# Altium PCB PCB1.PcbDoc (part 2 of 7)
Units mm, origin at the board's own origin, x right, y up, seen from the top; angles counter-clockwise.
Board outline 100 x 70 mm, 6 copper layers (Top Layer 1, GND_1, SIG, VCC, GND_2, Bottom Layer 1), stack 0.816 mm thick; 462 components, 328 nets, 2208 pads, 873 vias.
Unrouted connection lines stored in the file: 175.
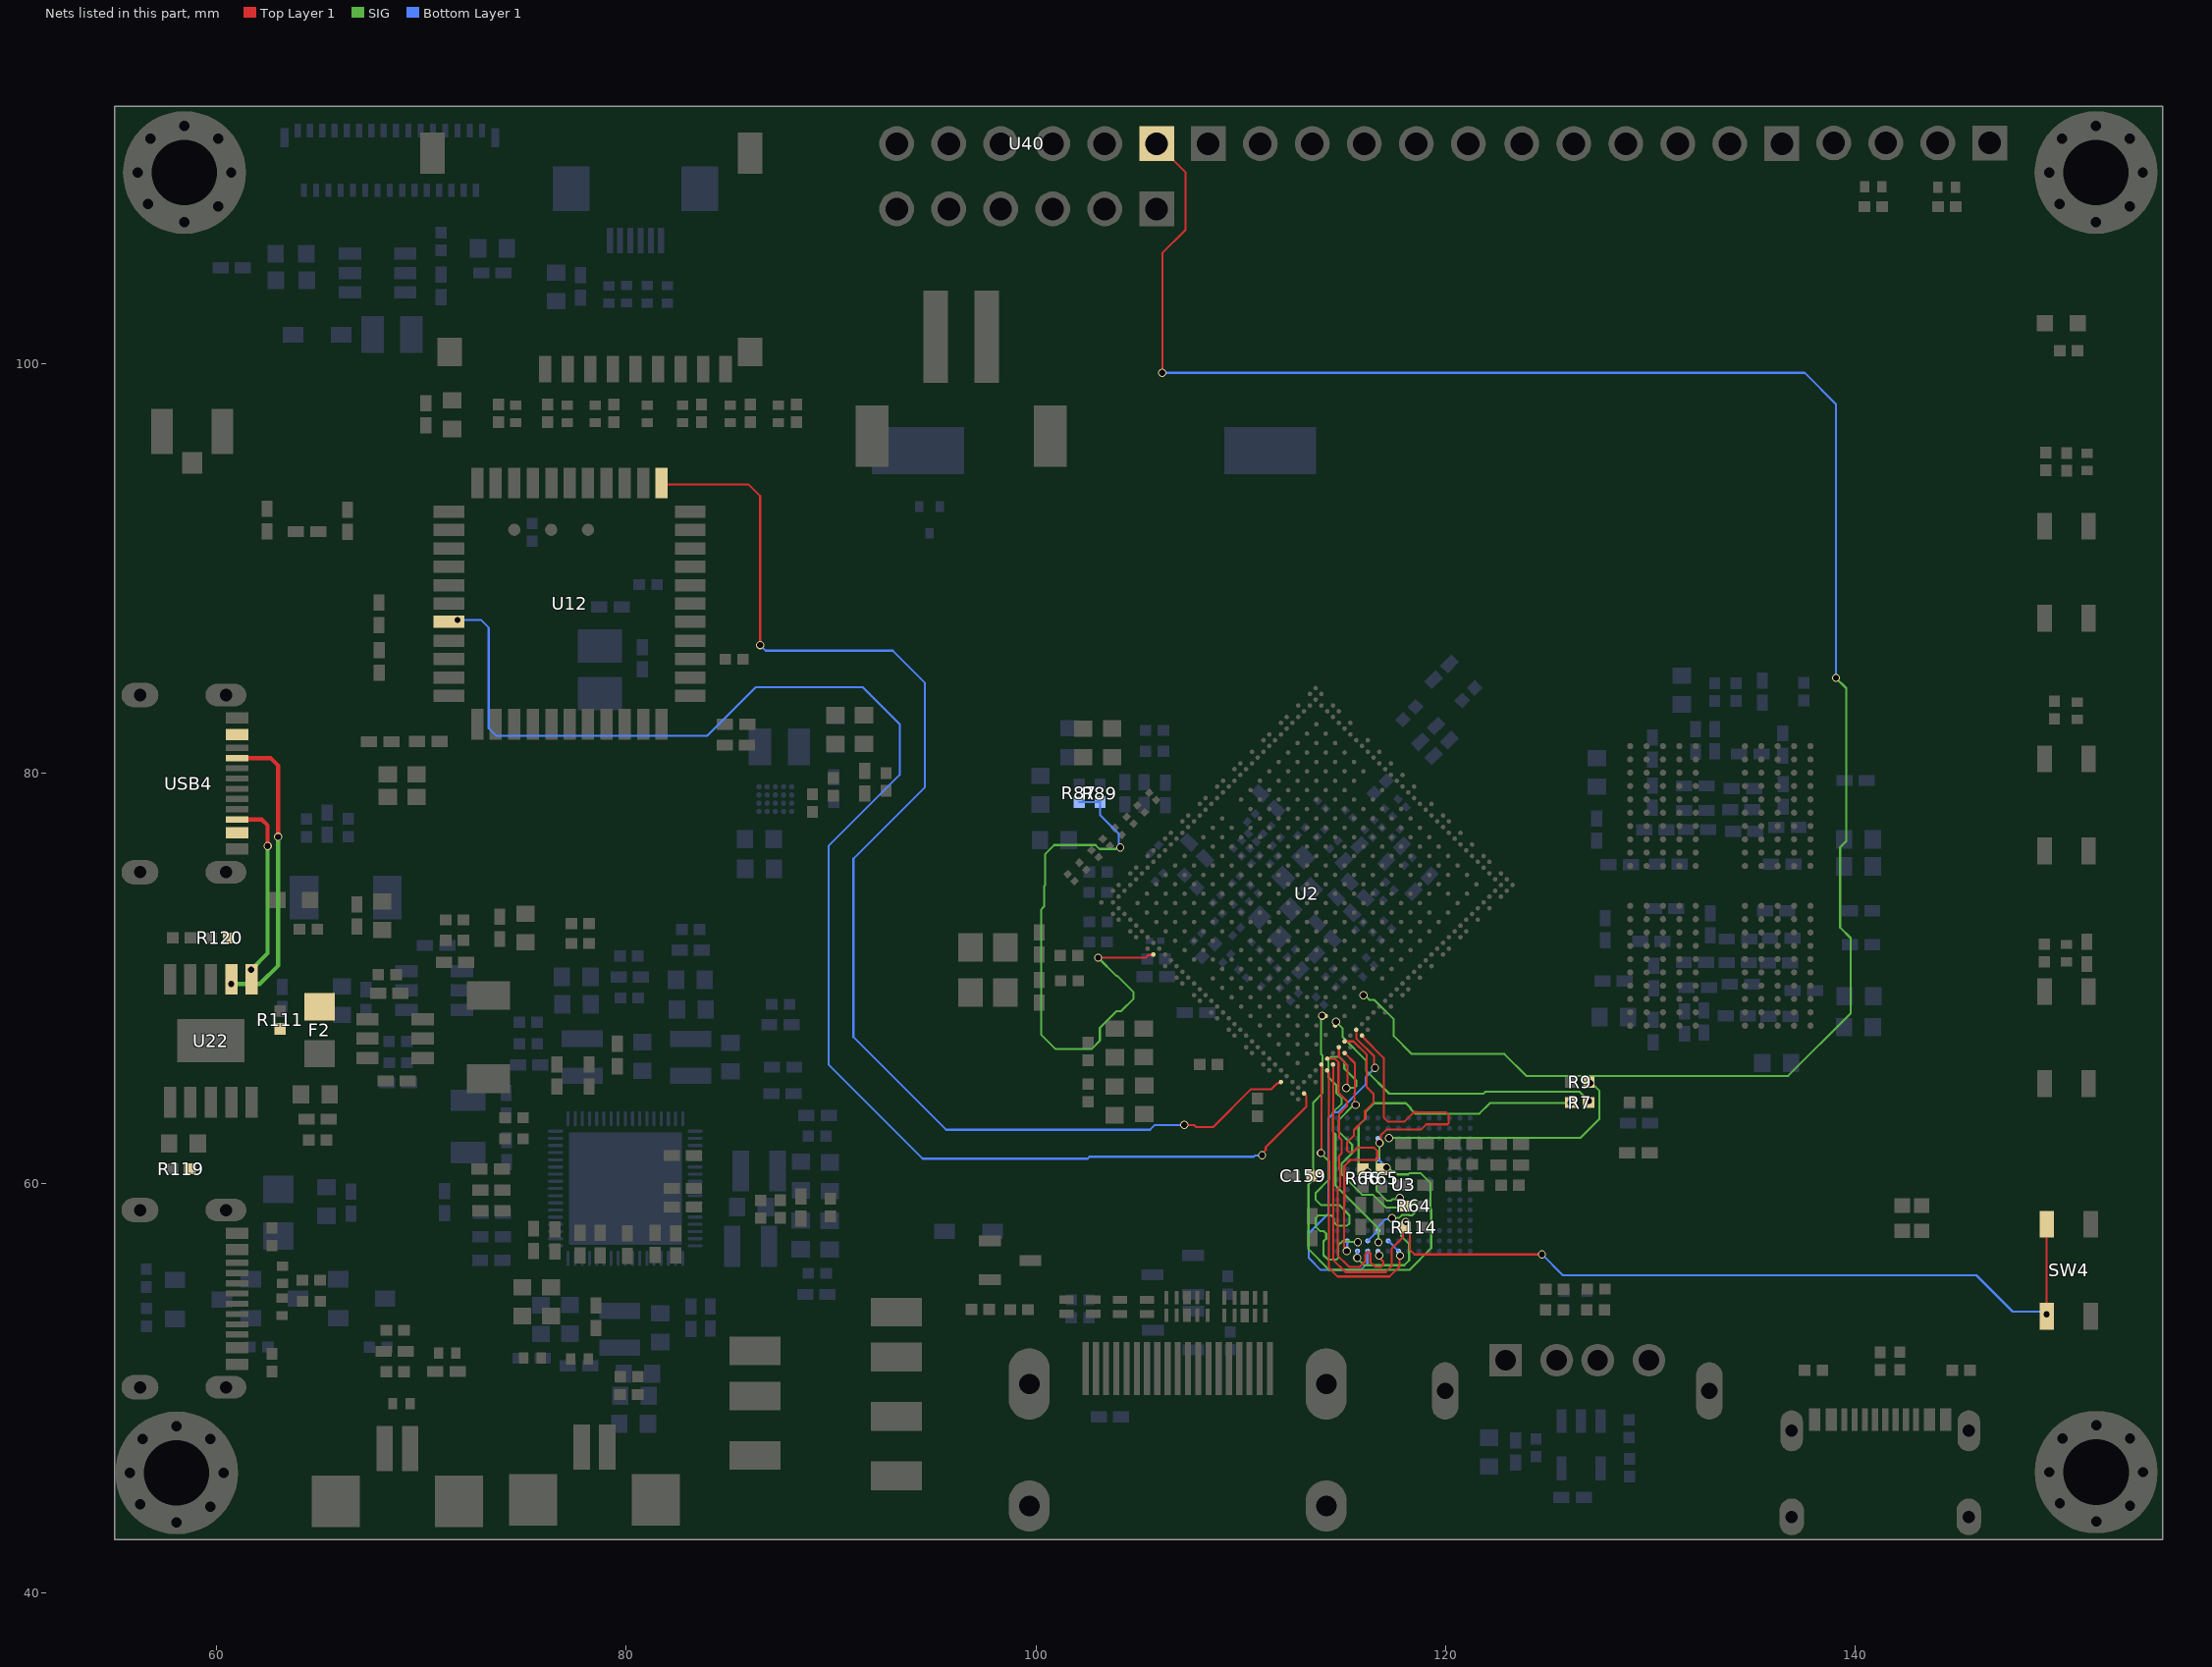
[diagram p6: the nets of this part, all layers, seen from the top]

## Footprints (in the part's own frame and the unit in brackets; to place one, negate y for a bottom-side part, rotate by r counter-clockwise, add the part's x,y. Pads: shape width x height; smd on the part's side, far side on the other; paste and mask are expansions set on the pad) (continued)
ESSOP-10_L4.9-W3.9-P1.0-LS6.0-TL-EP [mm]
  rect 0.6x1.5 smd paste+0 mask+0.05: 1(-2,-3) 2(-1,-3) 3(0,-3) 4(1,-3) 5(2,-3) 6(2,3) 7(1,3) 8(0,3) 9(-1,3) 10(-2,3)
  rect 3.3x2.1 smd paste+0 mask+0.05: 11(0,0)
  silkscreen extent -2.5,-1.95 2.5,1.95, body extent -2.42,-2.88 2.38,2.93, height 1.42
F0805 [mm]
  rect 1.335x1.5 smd paste-100 mask+0.051: 1(-1.142,0) 2(1.142,0)
  silkscreen extent -2.16,-1.02 2.16,1.02, body extent -1.12,-0.66 1.03,0.69, height 0.66
FBGA-153_L13.0-W11.5-P0.50_KLMAG1JETD-B041 [mm]
  round 0.25 smd paste-100 mask+0.05: A1(-3.25,3.25) A2(-2.75,3.25) A3(-2.25,3.25) A4(-1.75,3.25) A5(-1.25,3.25) A6(-0.75,3.25) A7(-0.25,3.25) A8(0.25,3.25) A9(0.75,3.25) A10(1.25,3.25) A11(1.75,3.25) A12(2.25,3.25) A13(2.75,3.25) A14(3.25,3.25) B1(-3.25,2.75) B2(-2.75,2.75) B3(-2.25,2.75) B4(-1.75,2.75) B5(-1.25,2.75) B6(-0.75,2.75) B7(-0.25,2.75) B8(0.25,2.75) B9(0.75,2.75) B10(1.25,2.75) B11(1.75,2.75) B12(2.25,2.75) B13(2.75,2.75) B14(3.25,2.75) C1(-3.25,2.25) C2(-2.75,2.25) C3(-2.25,2.25) C4(-1.75,2.25) C5(-1.25,2.25) C6(-0.75,2.25) C7(-0.25,2.25) C8(0.25,2.25) C9(0.75,2.25) C10(1.25,2.25) C11(1.75,2.25) C12(2.25,2.25) C13(2.75,2.25) C14(3.25,2.25) D1(-3.25,1.75) D2(-2.75,1.75) D3(-2.25,1.75) D4(-1.75,1.75) D12(2.25,1.75) D13(2.75,1.75) D14(3.25,1.75) E1(-3.25,1.25) E2(-2.75,1.25) E3(-2.25,1.25) E5(-1.25,1.25) E6(-0.75,1.25) E7(-0.25,1.25) E8(0.25,1.25) E9(0.75,1.25) E10(1.25,1.25) E12(2.25,1.25) E13(2.75,1.25) E14(3.25,1.25) F1(-3.25,0.75) F2(-2.75,0.75) F3(-2.25,0.75) F5(-1.25,0.75) F10(1.25,0.75) F12(2.25,0.75) F13(2.75,0.75) F14(3.25,0.75) G1(-3.25,0.25) G2(-2.75,0.25) G3(-2.25,0.25) G5(-1.25,0.25) G10(1.25,0.25) G12(2.25,0.25) G13(2.75,0.25) G14(3.25,0.25) H1(-3.25,-0.25) H2(-2.75,-0.25) H3(-2.25,-0.25) H5(-1.25,-0.25) H10(1.25,-0.25) H12(2.25,-0.25) H13(2.75,-0.25) H14(3.25,-0.25) J1(-3.25,-0.75) J2(-2.75,-0.75) J3(-2.25,-0.75) J5(-1.25,-0.75) J10(1.25,-0.75) J12(2.25,-0.75) J13(2.75,-0.75) J14(3.25,-0.75) K1(-3.25,-1.25) K2(-2.75,-1.25) K3(-2.25,-1.25) K5(-1.25,-1.25) K6(-0.75,-1.25) K7(-0.25,-1.25) K8(0.25,-1.25) K9(0.75,-1.25) K10(1.25,-1.25) K12(2.25,-1.25) K13(2.75,-1.25) K14(3.25,-1.25) L1(-3.25,-1.75) L2(-2.75,-1.75) L3(-2.25,-1.75) L12(2.25,-1.75) L13(2.75,-1.75) L14(3.25,-1.75) M1(-3.25,-2.25) M2(-2.75,-2.25) M3(-2.25,-2.25) M4(-1.75,-2.25) M5(-1.25,-2.25) M6(-0.75,-2.25) M7(-0.25,-2.25) M8(0.25,-2.25) M9(0.75,-2.25) M10(1.25,-2.25) M11(1.75,-2.25) M12(2.25,-2.25) M13(2.75,-2.25) M14(3.25,-2.25) N1(-3.25,-2.75) N2(-2.75,-2.75) N3(-2.25,-2.75) N4(-1.75,-2.75) N5(-1.25,-2.75) N6(-0.75,-2.75) N7(-0.25,-2.75) N8(0.25,-2.75) N9(0.75,-2.75) N10(1.25,-2.75) N11(1.75,-2.75) N12(2.25,-2.75) N13(2.75,-2.75) N14(3.25,-2.75) P1(-3.25,-3.25) P2(-2.75,-3.25) P3(-2.25,-3.25) P4(-1.75,-3.25) P5(-1.25,-3.25) P6(-0.75,-3.25) P7(-0.25,-3.25) P8(0.25,-3.25) P9(0.75,-3.25) P10(1.25,-3.25) P11(1.75,-3.25) P12(2.25,-3.25) P13(2.75,-3.25) P14(3.25,-3.25)
  silkscreen extent -6.22,-6.61 5.84,6.86, body extent -5.84,-6.6 5.84,6.48, height 0.25
FBGA-200_L15.0-W10.0-BL_H9HCNNNBKUMLXR [mm]
  round 0.3 smd paste+0 mask+0.05: A1(-6.825,-4.4) A2(-6.825,-3.6) A3(-6.825,-2.8) A4(-6.825,-2) A5(-6.825,-1.2) A8(-6.825,1.2) A9(-6.825,2) A10(-6.825,2.8) A11(-6.825,3.6) A12(-6.825,4.4) AA1(6.175,-4.4) AA2(6.175,-3.6) AA3(6.175,-2.8) AA4(6.175,-2) AA5(6.175,-1.2) AA8(6.175,1.2) AA9(6.175,2) AA10(6.175,2.8) AA11(6.175,3.6) AA12(6.175,4.4) AB1(6.825,-4.4) AB2(6.825,-3.6) AB3(6.825,-2.8) AB4(6.825,-2) AB5(6.825,-1.2) AB8(6.825,1.2) AB9(6.825,2) AB10(6.825,2.8) AB11(6.825,3.6) AB12(6.825,4.4) B1(-6.175,-4.4) B2(-6.175,-3.6) B3(-6.175,-2.8) B4(-6.175,-2) B5(-6.175,-1.2) B8(-6.175,1.2) B9(-6.175,2) B10(-6.175,2.8) B11(-6.175,3.6) B12(-6.175,4.4) C1(-5.525,-4.4) C2(-5.525,-3.6) C3(-5.525,-2.8) C4(-5.525,-2) C5(-5.525,-1.2) C8(-5.525,1.2) C9(-5.525,2) C10(-5.525,2.8) C11(-5.525,3.6) C12(-5.525,4.4) D1(-4.875,-4.4) D2(-4.875,-3.6) D3(-4.875,-2.8) D4(-4.875,-2) D5(-4.875,-1.2) D8(-4.875,1.2) D9(-4.875,2) D10(-4.875,2.8) D11(-4.875,3.6) D12(-4.875,4.4) E1(-4.225,-4.4) E2(-4.225,-3.6) E3(-4.225,-2.8) E4(-4.225,-2) E5(-4.225,-1.2) E8(-4.225,1.2) E9(-4.225,2) E10(-4.225,2.8) E11(-4.225,3.6) E12(-4.225,4.4) F1(-3.575,-4.4) F2(-3.575,-3.6) F3(-3.575,-2.8) F4(-3.575,-2) F5(-3.575,-1.2) F8(-3.575,1.2) F9(-3.575,2) F10(-3.575,2.8) F11(-3.575,3.6) F12(-3.575,4.4) G1(-2.925,-4.4) G2(-2.925,-3.6) G3(-2.925,-2.8) G4(-2.925,-2) G5(-2.925,-1.2) G8(-2.925,1.2) G9(-2.925,2) G10(-2.925,2.8) G11(-2.925,3.6) G12(-2.925,4.4) H1(-2.275,-4.4) H2(-2.275,-3.6) H3(-2.275,-2.8) H4(-2.275,-2) H5(-2.275,-1.2) H8(-2.275,1.2) H9(-2.275,2) H10(-2.275,2.8) H11(-2.275,3.6) H12(-2.275,4.4) J1(-1.625,-4.4) J2(-1.625,-3.6) J3(-1.625,-2.8) J4(-1.625,-2) J5(-1.625,-1.2) J8(-1.625,1.2) J9(-1.625,2) J10(-1.625,2.8) J11(-1.625,3.6) J12(-1.625,4.4) K1(-0.975,-4.4) K2(-0.975,-3.6) K3(-0.975,-2.8) K4(-0.975,-2) K5(-0.975,-1.2) K8(-0.975,1.2) K9(-0.975,2) K10(-0.975,2.8) K11(-0.975,3.6) K12(-0.975,4.4) N1(0.975,-4.4) N2(0.975,-3.6) N3(0.975,-2.8) N4(0.975,-2) N5(0.975,-1.2) N8(0.975,1.2) N9(0.975,2) N10(0.975,2.8) N11(0.975,3.6) N12(0.975,4.4) P1(1.625,-4.4) P2(1.625,-3.6) P3(1.625,-2.8) P4(1.625,-2) P5(1.625,-1.2) P8(1.625,1.2) P9(1.625,2) P10(1.625,2.8) P11(1.625,3.6) P12(1.625,4.4) R1(2.275,-4.4) R2(2.275,-3.6) R3(2.275,-2.8) R4(2.275,-2) R5(2.275,-1.2) R8(2.275,1.2) R9(2.275,2) R10(2.275,2.8) R11(2.275,3.6) R12(2.275,4.4) T1(2.925,-4.4) T2(2.925,-3.6) T3(2.925,-2.8) T4(2.925,-2) T5(2.925,-1.2) T8(2.925,1.2) T9(2.925,2) T10(2.925,2.8) T11(2.925,3.6) T12(2.925,4.4) U1(3.575,-4.4) U2(3.575,-3.6) U3(3.575,-2.8) U4(3.575,-2) U5(3.575,-1.2) U8(3.575,1.2) U9(3.575,2) U10(3.575,2.8) U11(3.575,3.6) U12(3.575,4.4) V1(4.225,-4.4) V2(4.225,-3.6) V3(4.225,-2.8) V4(4.225,-2) V5(4.225,-1.2) V8(4.225,1.2) V9(4.225,2) V10(4.225,2.8) V11(4.225,3.6) V12(4.225,4.4) W1(4.875,-4.4) W2(4.875,-3.6) W3(4.875,-2.8) W4(4.875,-2) W5(4.875,-1.2) W8(4.875,1.2) W9(4.875,2) W10(4.875,2.8) W11(4.875,3.6) W12(4.875,4.4) Y1(5.525,-4.4) Y2(5.525,-3.6) Y3(5.525,-2.8) Y4(5.525,-2) Y5(5.525,-1.2) Y8(5.525,1.2) Y9(5.525,2) Y10(5.525,2.8) Y11(5.525,3.6) Y12(5.525,4.4)
  silkscreen extent -7.8,-5.52 7.58,5.08, body extent -7.49,-5.08 7.62,5.08, height 0.25
FPC-SMD_6P-P0.50_DEALON_0.5K-DX-6PWB [mm]
  rect 0.3x1.25 smd paste+0 mask+0.05: 1(-1.25,2.406) 2(-0.75,2.406) 3(-0.25,2.406) 4(0.25,2.406) 5(0.75,2.406) 6(1.25,2.406)
  rect 1.8x2.2 smd paste+0 mask+0.05: 7(3.15,-0.12) 8(-3.15,-0.12)
  silkscreen extent -4.2,-3.09 4.2,2.71, body extent -3.25,-3.11 3.25,2.29, height 2.03
FPC-SMD_P0.30-31P_FGS-XJ-H1.0 [mm]
  rect 0.3x0.65 smd paste+0.051: 1(-4.5,-1.453) 2(-4.2,1.453) 3(-3.9,-1.453) 4(-3.6,1.453) 5(-3.3,-1.453) 6(-3,1.453) 7(-2.7,-1.453) 8(-2.4,1.453) 9(-2.1,-1.453) 10(-1.8,1.453) 11(-1.5,-1.453) 12(-1.2,1.453) 13(-0.9,-1.453) 14(-0.6,1.453) 15(-0.3,-1.453) 16(0,1.453) 17(0.3,-1.453) 18(0.6,1.453) 19(0.9,-1.453) 20(1.2,1.453) 21(1.5,-1.453) 22(1.8,1.453) 23(2.1,-1.453) 24(2.4,1.453) 25(2.7,-1.453) 26(3,1.453) 27(3.3,-1.453) 28(3.6,1.453) 29(3.9,-1.453) 30(4.2,1.453) 31(4.5,-1.453)
  rect 0.4x0.95 smd paste+0.051: 32(-5.15,-1.103) 33(5.15,-1.103)
  silkscreen extent -5.5,-1.95 5.5,1.6, body extent -5.46,-1.78 5.34,1.7, height 1.01
HDMI-SMD_KH-HDMI-19P-CU [mm]
  rect 0.3x2.6 smd paste-100 mask+0.051: 1(4.5,3.36) 2(4,3.36) 3(3.5,3.36) 4(3,3.36) 5(2.5,3.36) 6(2,3.36) 7(1.5,3.36) 8(1,3.36) 9(0.5,3.36) 10(0,3.36) 11(-0.5,3.36) 12(-1,3.36) 13(-1.5,3.36) 14(-2,3.36) 15(-2.5,3.36) 16(-3,3.36) 17(-3.5,3.36) 18(-4,3.36) 19(-4.5,3.36)
  oval 2x3.5 hole 1 slot 2.8 at 90 deg: 20(-7.25,2.6) 21(7.25,2.6)
  oval 2x2.5 hole 1 slot 1.8 at 90 deg: 22(-7.25,-3.36) 23(7.25,-3.36)
  silkscreen extent -7.62,-8.13 7.62,4.57, body extent -7.45,-7.89 7.55,4.31, height 6.29
HDR-TH_4P-P2.54-V-M [mm]
  rect 1.7x1.7 hole 1.1 paste-2539.97: 1(-3.81,0)
  round 1.7 hole 1.1 paste-2539.97: 2(-1.27,0) 3(1.27,0) 4(3.81,0)
  silkscreen extent -5.08,-1.27 5.08,1.27, body extent -5.04,-1.34 5.12,1.2, height 10.13
HDR-TH_6P-P2.54-V-M [mm]
  rect 1.7x1.7 hole 1.1: 1(-6.35,0)
  round 1.7 hole 1.1: 2(-3.81,0) 3(-1.27,0) 4(1.27,0) 5(3.81,0) 6(6.35,0)
  silkscreen extent -7.6,-1.3 7.65,1.3, body extent -7.71,-1.38 7.53,1.16, height 9.63
IND-SMD_L2.0-W1.6_MHCHL201610A-1R0M-Q8A [mm]
  rect 0.8x2 smd paste+0.051: 1(-0.9,0) 2(0.9,0)
  silkscreen extent -0.46,-1.14 0.46,1.14, body extent -1,-0.65 1,0.6, height 1.1
IND-SMD_L2.5-W2.0_WPN252012H [mm]
  rect 1.1x1.8 smd: 1(-0.95,0) 2(0.95,0)
  silkscreen extent -1.33,-1.09 1.33,1.09, body extent -1.25,-0.98 1.25,0.92, height 1.1
IND-SMD_L4.4-W4.2 [mm]
  rect 1.4x2.12 smd paste+0.051: 1(2.028,0) 2(-2.028,0)
  silkscreen extent -2.28,-2.18 2.28,2.18, body extent -2.17,-2.05 2.17,2.05, height 1.05
L0603 [mm]
  rect 0.8x0.864 smd paste-100 mask+0.051: 1(-0.7,0) 2(0.7,0)
  silkscreen extent -1.42,-0.65 1.42,0.65, body extent -0.8,-0.4 0.8,0.4, height 0.81
L1008 [mm]
  rect 1.635x2.16 smd paste-100 mask+0.051: 1(-1.168,0) 2(1.168,0)
  silkscreen extent -2.27,-1.27 2.27,1.3, body extent -1.22,-1.02 1.28,0.98, height 1
LED0603-BL [mm]
  rect 0.8x0.8 smd: 1(-0.926,0) 2(0.672,0)
  silkscreen extent -1.62,-0.75 1.26,0.76, body extent -0.93,-0.4 0.67,0.4, height 0.53
LED-ARRAY-SMD_4P-L1.6-W1.6_SY-PB2333RGBC-010F [mm]
  rect 0.7x0.75 smd paste+0.051: 1(-0.62,0.475) 2(0.62,0.475) 3(-0.62,-0.475) 4(0.62,-0.475)
  silkscreen extent -1.27,-1.14 1.4,1.14, body extent -1.1,-1 1.1,1, height 0.84
QFN-44_L12.0-W12.0-P0.90-TL_AP6212 [mm]
  rect 1.5x0.6 smd paste+0 mask+0.05: 1(-5.889,4.496) 2(-5.889,3.607) 3(-5.889,2.692) 4(-5.889,1.803) 5(-5.889,0.889) 6(-5.889,0) 7(-5.889,-0.889) 8(-5.889,-1.803) 9(-5.889,-2.692) 10(-5.889,-3.607) 11(-5.889,-4.496) 23(5.889,-4.496) 24(5.889,-3.607) 25(5.889,-2.692) 26(5.889,-1.803) 27(5.889,-0.889) 28(5.889,0) 29(5.889,0.889) 30(5.889,1.803) 31(5.889,2.692) 32(5.889,3.607) 33(5.889,4.496)
  rect 0.6x1.5 smd paste+0 mask+0.05: 12(-4.496,-5.889) 13(-3.607,-5.889) 14(-2.692,-5.889) 15(-1.803,-5.889) 16(-0.889,-5.889) 17(0,-5.889) 18(0.889,-5.889) 19(1.803,-5.889) 20(2.692,-5.889) 21(3.607,-5.889) 22(4.496,-5.889) 34(4.496,5.889) 35(3.607,5.889) 36(2.692,5.889) 37(1.803,5.889) 38(0.889,5.889) 39(0,5.889) 40(-0.889,5.889) 41(-1.803,5.889) 42(-2.692,5.889) 43(-3.607,5.889) 44(-4.496,5.889)
  round 0.6 smd paste+0 mask+0.05: 45(-2.7,3.607) 46(-0.9,3.607) 47(0.9,3.607)
  silkscreen extent -5.99,-5.99 5.99,5.99, body extent -5.97,-5.97 5.97,6.02, height 0.51
QFN-68_L7.0-W7.0-P0.35-BL-EP5.5 [mm]
  oval 0.74x0.15 smd paste-100 mask+0.051: 1(-3.407,2.8) 2(-3.407,2.45) 3(-3.407,2.1) 4(-3.407,1.75) 5(-3.407,1.4) 6(-3.407,1.05) 7(-3.407,0.7) 8(-3.407,0.35) 9(-3.407,0) 10(-3.407,-0.35) 11(-3.407,-0.7) 12(-3.407,-1.05) 13(-3.407,-1.4) 14(-3.407,-1.75) 15(-3.407,-2.1) 16(-3.407,-2.45) 17(-3.407,-2.8) 35(3.407,-2.8) 36(3.407,-2.45) 37(3.407,-2.1) 38(3.407,-1.75) 39(3.407,-1.4) 40(3.407,-1.05) 41(3.407,-0.7) 42(3.407,-0.35) 43(3.407,0) 44(3.407,0.35) 45(3.407,0.7) 46(3.407,1.05) 47(3.407,1.4) 48(3.407,1.75) 49(3.407,2.1) 50(3.407,2.45) 51(3.407,2.8)
  oval 0.15x0.74 smd paste-100 mask+0.051: 18(-2.8,-3.407) 19(-2.45,-3.407) 20(-2.1,-3.407) 21(-1.75,-3.407) 22(-1.4,-3.407) 23(-1.05,-3.407) 24(-0.7,-3.407) 25(-0.35,-3.407) 26(0,-3.407) 27(0.35,-3.407) 28(0.7,-3.407) 29(1.05,-3.407) 30(1.4,-3.407) 31(1.75,-3.407) 32(2.1,-3.407) 33(2.45,-3.407) 34(2.8,-3.407) 52(2.8,3.407) 53(2.45,3.407) 54(2.1,3.407) 55(1.75,3.407) 56(1.4,3.407) 57(1.05,3.407) 58(0.7,3.407) 59(0.35,3.407) 60(0,3.407) 61(-0.35,3.407) 62(-0.7,3.407) 63(-1.05,3.407) 64(-1.4,3.407) 65(-1.75,3.407) 66(-2.1,3.407) 67(-2.45,3.407) 68(-2.8,3.407)
  rect 5.5x5.5 smd paste-100 mask+0.051: 69(0,0)
  silkscreen extent -4.19,-3.58 3.58,3.58, body extent -3.56,-3.56 3.56,3.56, height 0.25
R0201 [mm]
  rect 0.303x0.324 smd paste-100 mask+0.051: 1(-0.242,0) 2(0.242,0)
  silkscreen extent -0.62,-0.39 0.62,0.39, body extent -0.3,-0.15 0.3,0.15, height 0.23
R0402 [mm]
  rect 0.566x0.54 smd paste-100 mask+0.051: 1(-0.433,0) 2(0.433,0)
  silkscreen extent -0.94,-0.5 0.94,0.5, body extent -0.49,-0.26 0.51,0.24, height 0.35
R0603 [mm]
  rect 0.806x0.864 smd paste-100 mask+0.051: 1(-0.753,0) 2(0.753,0)
  silkscreen extent -1.39,-0.66 1.39,0.66, body extent -0.82,-0.4 0.78,0.4, height 0.45
RF-SMD_FRF05002-JSS103M [mm]
  rect 1x1.05 smd paste+0 mask+0.05: 1(0,-0.762)
  rect 1.05x2.2 smd paste+0 mask+0.05: 2(-1.475,0.762) 3(1.475,0.762)
  silkscreen extent -1.3,-0.63 1.3,2.35, body extent -1.49,-0.87 1.51,2.23, height 1.25
SOD-323_L1.8-W1.3-LS2.5-RD [mm]
  rect 1x0.75 smd: 1(-1.173,0) 2(1.173,0)
  silkscreen extent -1.08,-0.8 0.9,0.8, body extent -1.24,-0.7 1.26,0.7, height 0.62
SOT-23-3_L2.9-W1.3-P1.90-LS2.3-BR [mm]
  rect 1.07x0.532 smd: 1(0.99,-0.95) 2(0.99,0.95) 3(-0.99,0)
  silkscreen extent -0.66,-1.45 0.64,1.45, body extent -1.2,-1.45 1.2,1.45, height 1.15
SOT-23-5_L3.0-W1.7-P0.95-LS2.8-BL [mm]
  rect 0.49x1.157 smd: 1(-0.95,-1.154) 2(0,-1.154) 3(0.95,-1.154)
  rect 0.49x1.175 smd: 4(0.95,1.154) 5(-0.95,1.154)
  silkscreen extent -1.8,-1.29 1.53,0.85, body extent -1.5,-1.42 1.5,1.42, height 1.22
SOT-23-6_L2.9-W1.6-P0.95-LS2.8-BR [mm]
  rect 1.1x0.6 smd paste+0 mask+0.051: 1(1.35,-0.95) 2(1.35,0) 3(1.35,0.95) 4(-1.35,0.95) 5(-1.35,0) 6(-1.35,-0.95)
  silkscreen extent -0.9,-1.78 1.52,1.55, body extent -1.62,-1.46 1.58,1.46, height 1.15
SOT-23_L2.9-W1.3-P1.90-LS2.4-BR [mm]
  rect 1x0.8 smd: 1(1.15,-0.95) 2(1.15,0.95) 3(-1.15,0)
  silkscreen extent -0.7,-1.5 0.7,1.5, body extent -1.18,-1.46 1.18,1.46, height 1.12
SOT-523-3_L1.6-W0.8-P1.00-LS1.6-BR [mm]
  rect 0.51x0.4 smd paste+0.051: 1(0.65,-0.5) 2(0.65,0.5) 3(-0.65,0)
  silkscreen extent -0.45,-1.08 0.83,0.9, body extent -1.02,-1.02 1.08,0.98, height 1.1
SW-SMD_4P-L4.2-W3.3-P2.15-LS5.1 [mm]
  rect 1.3x0.7 smd paste+0.051: 1(-2.25,1.075) 2(2.25,1.075) 3(-2.25,-1.075) 4(2.25,-1.075)
  silkscreen extent -2.1,-1.7 2.1,1.7, body extent -2.55,-1.65 2.55,1.65, height 2.4
TCS4525 [mm]
  round 0.265 smd paste+0.051: A1(0,0) A2(0.4,0) A3(0.8,0) A4(1.2,0) B1(0,-0.4) B2(0.4,-0.4) B3(0.8,-0.4) B4(1.2,-0.4) C1(0,-0.8) C2(0.4,-0.8) C3(0.8,-0.8) C4(1.2,-0.8) D1(0,-1.2) D2(0.4,-1.2) D3(0.8,-1.2) D4(1.2,-1.2) E1(0,-1.6) E2(0.4,-1.6) E3(0.8,-1.6) E4(1.2,-1.6)
  silkscreen extent -0.38,-1.82 1.44,0.39, body extent -0.22,-1.79 1.43,0.24, height 0.25
TF-SMD_TF-01A [mm]
  rect 0.6x1.3 smd: 1(2.24,5.276) 2(1.14,5.276) 3(0.04,5.276) 4(-1.06,5.276) 5(-2.16,5.276) 6(-3.26,5.276) 7(-4.36,5.276) 8(-5.46,5.276) 9(-6.56,5.276)
  rect 1.2x1.4 smd: 10(-7.76,4.426) 13(6.92,4.426)
  rect 1.2x2 smd: 11(-7.76,-5.276) 12(7.76,-5.276)
  Keep-Out Layer board cut-out: 3.55,-5.566 3.55,-5.666 3.474,-5.849 3.333,-5.99 3.149,-6.066 2.951,-6.066 2.767,-5.99 2.626,-5.849 2.55,-5.666 2.55,-5.566 2.55,-5.467 2.626,-5.283 2.767,-5.142 2.951,-5.066 3.149,-5.066 3.333,-5.142 3.474,-5.283 3.55,-5.467 3.55,-5.566 3.55,-5.566
  Keep-Out Layer board cut-out: -4.45,-5.566 -4.45,-5.666 -4.526,-5.849 -4.667,-5.99 -4.85,-6.066 -5.049,-6.066 -5.233,-5.99 -5.374,-5.849 -5.45,-5.666 -5.45,-5.566 -5.45,-5.467 -5.374,-5.283 -5.233,-5.142 -5.049,-5.066 -4.85,-5.066 -4.667,-5.142 -4.526,-5.283 -4.45,-5.467 -4.45,-5.566 -4.45,-5.566
  Keep-Out Layer circle w0.025: c3.05,-5.566 r0.5
  Keep-Out Layer circle w0.025: c-4.95,-5.566 r0.5
  Keep-Out Layer region: 3.55,-5.566 3.55,-5.666 3.474,-5.849 3.333,-5.99 3.149,-6.066 2.951,-6.066 2.767,-5.99 2.626,-5.849 2.55,-5.666 2.55,-5.566 2.55,-5.467 2.626,-5.283 2.767,-5.142 2.951,-5.066 3.149,-5.066 3.333,-5.142 3.474,-5.283 3.55,-5.467 3.55,-5.566 3.55,-5.566
  Keep-Out Layer region: -4.45,-5.566 -4.45,-5.666 -4.526,-5.849 -4.667,-5.99 -4.85,-6.066 -5.049,-6.066 -5.233,-5.99 -5.374,-5.849 -5.45,-5.666 -5.45,-5.566 -5.45,-5.467 -5.374,-5.283 -5.233,-5.142 -5.049,-5.066 -4.85,-5.066 -4.667,-5.142 -4.526,-5.283 -4.45,-5.467 -4.45,-5.566 -4.45,-5.566
  silkscreen extent -7.37,-9.58 7.37,3.41, body extent -8,-9.78 7.97,5.71, height 1.92
USB-A-TH_AF-10.0-HC6.3 [mm]
  rect 1.6x1.6 hole 1 paste-2539.97 mask+0.05: 1(-3.5,0.75)
  round 1.6 hole 1 paste-2539.97 mask+0.05: 2(-1,0.75) 3(1,0.75) 4(3.5,0.75)
  oval 1.3x2.8 hole 0.8 slot 2.1 at 90 deg paste-2539.97 mask+0.05: 5(-6.45,-0.75) 6(6.45,-0.75)
  silkscreen extent -6.6,-9.27 6.6,1.02, body extent -7.34,-13.48 7.16,1.18, height 7.48
USB-C-SMD_TYPE-C-6PIN-2MD-073 [mm]
  rect 0.55x1.1 smd paste-100 mask+0.05: 1(-3.2,3.391) 2(-2.4,3.391) 11(2.4,3.391) 12(3.2,3.391)
  rect 0.3x1.1 smd paste-100 mask+0.05: 3(-1.75,3.391) 4(-1.25,3.391) 5(-0.75,3.391) 6(-0.25,3.391) 7(0.25,3.391) 8(0.75,3.391) 9(1.25,3.391) 10(1.75,3.391)
  oval 1.2x1.8 hole 0.6 slot 1.2 at 90 deg paste-2539.97 mask+0.05: 13(-4.325,-1.359) 14(4.325,-1.359)
  oval 1.1x2 hole 0.6 slot 1.5 at 90 deg paste-2539.97 mask+0.05: 13(-4.325,2.841) 14(4.325,2.841)
  Keep-Out Layer board cut-out: 3.24,2.321 3.24,2.251 3.187,2.123 3.088,2.024 2.96,1.971 2.821,1.971 2.692,2.024 2.593,2.123 2.54,2.251 2.54,2.321 2.54,2.391 2.593,2.519 2.692,2.618 2.821,2.671 2.96,2.671 3.088,2.618 3.187,2.519 3.24,2.391 3.24,2.321 3.24,2.321
  Keep-Out Layer board cut-out: -2.54,2.321 -2.54,2.251 -2.593,2.123 -2.692,2.024 -2.82,1.971 -2.96,1.971 -3.088,2.024 -3.187,2.123 -3.24,2.251 -3.24,2.321 -3.24,2.391 -3.187,2.519 -3.088,2.618 -2.96,2.671 -2.82,2.671 -2.692,2.618 -2.593,2.519 -2.54,2.391 -2.54,2.321 -2.54,2.321
  Keep-Out Layer circle w0.025: c2.89,2.321 r0.35
  Keep-Out Layer circle w0.025: c-2.89,2.321 r0.35
  Keep-Out Layer region: 3.24,2.321 3.24,2.251 3.187,2.123 3.088,2.024 2.96,1.971 2.821,1.971 2.692,2.024 2.593,2.123 2.54,2.251 2.54,2.321 2.54,2.391 2.593,2.519 2.692,2.618 2.821,2.671 2.96,2.671 3.088,2.618 3.187,2.519 3.24,2.391 3.24,2.321 3.24,2.321
  Keep-Out Layer region: -2.54,2.321 -2.54,2.251 -2.593,2.123 -2.692,2.024 -2.82,1.971 -2.96,1.971 -3.088,2.024 -3.187,2.123 -3.24,2.251 -3.24,2.321 -3.24,2.391 -3.187,2.519 -3.088,2.618 -2.96,2.671 -2.82,2.671 -2.692,2.618 -2.593,2.519 -2.54,2.391 -2.54,2.321 -2.54,2.321
  silkscreen extent -4.5,-3.96 4.57,1.61, body extent -4.48,-3.85 4.46,3.75, height 3.1
X1-DFN1006-2_L1.0-W0.6-RD [mm]
  rect 0.4x0.7 smd paste+0.051: 1(-0.35,0) 2(0.35,0)
  silkscreen extent -0.85,-0.51 0.71,0.51, body extent -0.7,-0.51 0.7,0.54, height 0.4

## Part data
*1: "LDO from TaoBao"
AUDIO1: "3.5mm耳机座 七脚四极带三组开关耳机插座；耐高温贴片耳机插座", Symbol=PJ-393_C2837065
BT1: "Battery", Symbol=CR1220-2ZX
C1 C21 C65 C76 C78 C84 C87 C92 C105 C118 C119 C120 C121 C122 C127 C129 C132 C133 C134 C139 C141 C146 C148: "16V 22uF X5R ±20% 0603 Ceramic Capacitors ROHS"
C2 C3 C22 C23 C57 C59 C67 C77 C79 C80 C85 C88 C93 C101 C106 C112 C128 C140 C147 C150 C154 C168 C172 C189 C190 C242 C244 C251: "10V 10uF X5R ±10% 0603 Ceramic Capacitors ROHS"
C4 C24 C47 C49 C55 C71 C72 C74 C75 C82 C83 C86 C90 C94 C95 C96 C97 C98 C99 C102 C103 C104 C107 C108 C110 C111 C123 C125 C170 C206 C218 C219 C222 C224 C228 C252: "50V 1uF X5R ±10% 0402 Ceramic Capacitors ROHS"
C5 C6 C7 C8 C9 C10 C11 C12 C13 C14 C15 C16 C17 C18 C19 C20 C25 C26 C27 C28 C29 C30 C31 C32 C33 C34 C35 C36 C37 C38 C39 C40 C41 C42 C46 C50 C53 C58 C60 C63 C66 C68 C69 C70 C91 C100 C116 C151 C152 C153 C155 C156 C157 C159 C160 C161 C162 C163 C165 C166 C169 C171 C173 C179 C191 C200 C233 C240 C243 C245 C246 C250: "50V 100nF X7R ±10% 0402 Ceramic Capacitors ROHS"
C43 C44 C124: library part 1nF, "50V 1nF X7R ±10% 0402 Ceramic Capacitors ROHS"
C45: "50V 10pF C0G ±5% 0402 Ceramic Capacitors ROHS"
C48 C51 C61 C62 C248 C249: "50V 12pF C0G ±5% 0402 Ceramic Capacitors ROHS"
C52 C56 C109 C135 C136 C138 C143 C144 C145 C164 C167 C174 C183 C184 C188 C201: "10V 4.7uF X5R ±20% 0402 Ceramic Capacitors ROHS"
C54 C126 C130 C131 C137 C142 C180 C181 C182 C185 C186 C187 C192 C193 C194 C195 C196 C197 C198 C199 C202 C203 C204 C205 C207 C208 C209 C210 C211 C212 C213 C214 C215 C216 C217 C220 C221 C223 C225 C226 C227 C229 C230 C231 C234 C237 C238 C239: "CL03A104KO3NNNC"
C64 C241: "50V 22pF C0G ±5% 0402 Ceramic Capacitors ROHS"
C73 C81 C89 C235 C236: "50V 1nF X7R ±10% 0402 Ceramic Capacitors ROHS"
C113: "50V 100pF C0G ±5% 0402 Ceramic Capacitors ROHS"
C114 C115: "50V 680pF C0G ±5% 0402 Ceramic Capacitors ROHS"
C117: "50V 27pF C0G ±5% 0402 Ceramic Capacitors ROHS"
C149: library part 10nF, "50V 10nF X7R ±10% 0402 Ceramic Capacitors ROHS"
C158 C247: "50V 2.2uF NP0 0402 Ceramic Capacitors ROHS"
C253: "16V 220pF X7R ±10% 0402 Ceramic Capacitors ROHS"
CN1: "HDMI-A SMD USB, DVI, HDMI Connector Assemblies ROHS", Current Rating (Max)=-, JLCPCB Part Class="Extended Part", Manufacturer=kinghelm(金航标), Add into BOM=yes, Connector Type=HDMI-A, Convert to PCB=yes, Datasheet=https://atta.szlcsc.com/upload/public/pdf/source/20211208/D47DE7411E98B8CA58BDDFA754B04DEC.pdf, Device=KH-HDMI-19P-Cu, Gender=Mother, LCSC Part Name=KH-HDMI-19P-Cu, Manufacturer Part=KH-HDMI-19P-Cu, Mounting Style="Horizontal attachment", Number of Pins=19P, Operating Temperature Range=-, Rated Voltage (Max)=-, Supplier=LCSC, Supplier Footprint=SMD, Supplier Part=C709361, Symbol=KH-HDMI-19P-CU
CN3 CN4: "SMD,P=1.25mm,卧贴  1x2P 间距:1.25mm 卧贴 系列:PicoBlade(MX 1.25)", Symbol=HC-1.25-2PWT
D1 D2: "ESD5344D是一款超低电容TVS（瞬态电压抑制器）阵列，旨在保护高速数据接口。它专门用于保护连接到数据和传输线路的敏感电子元件，使其免受ESD（静电放电）引起的过应力影响。ESD5344D集成了四对超低电容转向二极管和一个TVS二极管。根据IEC61000 - 4 - 2标准，ESD5344D可提供高达±20kV（接触放电）的ESD保护；根据IEC61000 - 4 - 5标准，它能承受高达4A（8/20μs）的峰值脉冲电流。ESD5344D采用DFN2510 - 10L封装。标准产品无铅且无卤素。", Symbol=ESD5344D-10/TR
D3 D4 D5 D6: "VRWM:5V, IPP:3.3A, CJ:0.35pF", Symbol=TPESD5341N
D7: library part 1N5819WS_C191023, "25A 40V 600mV@1A 1A SOD-323 Single Diodes ROHS", Current - Rectified=1A, JLCPCB Part Class="Basic Part", LCSC Part Name="电压:40V 电流:1A", Manufacturer=Hottech(合科泰), Non-Repetitive Peak Forward Surge Current=25A, Voltage - DC Reverse(Vr)=40V, Voltage - Forward(Vf@If)=600mV@1A, Add into BOM=yes, Convert to PCB=yes, Datasheet=https://item.szlcsc.com/datasheet/1N5819WS/213850.html, Device=1N5819WS_C191023, Manufacturer Part=1N5819WS, Supplier=LCSC, Supplier Footprint=SOD-323, Supplier Part=C191023, Symbol=1N5819WS
D8: "特性：塑料封装符合UL 94V-0阻燃等级。 适用于表面贴装应用。 金属硅结，多数载流子传导。 低功耗，高效率。 内置应力消除，适合自动贴装。 高正向浪涌电流能力。 保证高温焊接：端子处250℃/10秒", Symbol=DSK34_C727076
D9: "电压:30V 电流:200mA 特性：低正向压降。 快速开关。 PN结保护环，用于瞬态和ESD保护", Symbol=BAT54CT
F1 F2: "6V 2A 0805自恢复", Symbol=BSMD0805L-200
FPC1: "FPC SMD,P=0.3mm,卧贴", Symbol=AFE03-S31FMA-1H
H1: library part "HX PZ2.54-1x4P ZZ", "4P 1x4P Gold Brass -40℃~+105℃ Black Pin Header 2.54mm 2.5mm 6mm 1kV 3mm 3A 1 Through Hole Through Hole,P=2.54mm Headers, Male Pins ROHS", Color=Black, Current Rating=3A, JLCPCB Part Class="Extended Part", LCSC Part Name="1x3P 间距:2.54mm 方针 直插", Manufacturer=hanxia(韩下), Manufacturer Part="HX PZ2.54-1x3P ZZ", Operating Temperature=-40℃~+105℃, Voltage Rating (Max)=1kV, Add into BOM=yes, Circluar Pins/Square Pins="Pin Header", Contact Material=Brass, Contact Plating=Gold, Convert to PCB=yes, Datasheet=https://item.szlcsc.com/datasheet/HX%2520PZ2.54-1x3P%2520ZZ/34444549.html, Device="HX PZ2.54-1x3P ZZ", Insulation Height=2.5mm, Length of End Connection Pin=3mm, Length of Mating Pin=6mm, Mounting Type="Through Hole", Number of Pins=3P, Number of Rows=1, Pin Structure=1x3P, Pitch=2.54mm, Row Spacing=-, Supplementary Features=-, Supplier=LCSC, Supplier Footprint=插件,P=2.54mm, Supplier Part=C32713269, Symbol="HX PZ2.54-1X3P ZZ"
JP1: library part U.FL-R-SMT-1(80)_C88374, JLCPCB Part Class="Extended Part", LCSC Part Name="IPEX 内针", Manufacturer=HRS(广濑), Manufacturer Part=U.FL-R-SMT-1(80), Operating Temperature Range=-40℃~+90℃, Add into BOM=yes, Connector Type="Board Side", Convert to PCB=yes, Datasheet=https://item.szlcsc.com/datasheet/U.FL-R-SMT-1(80)/89553.html, Device=U.FL-R-SMT-1(80)_C88374, Impedance=50Ω, Interface="Male Pin", Interface Diameter=2mm, Interface Length/Height=1.25mm, Number of Ports=1, RF Series=IPEX, Style=-, Supplier=LCSC, Supplier Footprint=SMD, Supplier Part=C88374, Symbol=U.FL-R-SMT-1(80)
L1: library part MLP2520S4R7MT0S1, "SMD 1008 4.7uH ±20%", Current Rating=4.15A, DC Resistance(DCR)=18mΩ, JLCPCB Part Class="Extended Part", LCSC Part Name="1uH ±30%", Manufacturer=Sunltech(顺磁), Manufacturer Part=SLW4030S1R0NST, Tolerance=±30%, Add into BOM=yes, Convert to PCB=yes, Datasheet=https://item.szlcsc.com/datasheet/SLW4030S1R0NST/207399.html, Device=SLW4030S1R0NST, Supplier=LCSC, Supplier Footprint=SMD,4x4mm, Supplier Part=C206354, Symbol=SLW4030S1R0NST
L2: library part MWSA0402S-3R3MT, "SMD,4.4x4.2mm 特性：铁合金材料,高饱和电流,低DCR。闭合磁路设计,漏磁干扰小。无卤,符合RoHS标准。Metal material for large current and low DCR。Closed magnetic circuit design reduces leakage flux。Halogen free, RoHS compliant。应用：TV、显卡、内存。笔记本电脑、平板电脑", Current Rating=4.15A, DC Resistance(DCR)=18mΩ, JLCPCB Part Class="Extended Part", LCSC Part Name="1uH ±30%", Manufacturer=Sunltech(顺磁), Manufacturer Part=SLW4030S1R0NST, Tolerance=±30%, Add into BOM=yes, Convert to PCB=yes, Datasheet=https://item.szlcsc.com/datasheet/SLW4030S1R0NST/207399.html, Device=SLW4030S1R0NST, Supplier=LCSC, Supplier Footprint=SMD,4x4mm, Supplier Part=C206354, Symbol=SLW4030S1R0NST
L3 L4 L5 L6 L7: library part MCS20FC-R47MHC, "0806 MCS20FC-R47MHC", Current Rating=4.15A, DC Resistance(DCR)=18mΩ, JLCPCB Part Class="Extended Part", LCSC Part Name="1uH ±30%", Manufacturer=Sunltech(顺磁), Manufacturer Part=SLW4030S1R0NST, Tolerance=±30%, Add into BOM=yes, Convert to PCB=yes, Datasheet=https://item.szlcsc.com/datasheet/SLW4030S1R0NST/207399.html, Device=SLW4030S1R0NST, Supplier=LCSC, Supplier Footprint=SMD,4x4mm, Supplier Part=C206354, Symbol=SLW4030S1R0NST
L8 L9 L10: library part BLM18PG181SN1D, "单路 0603磁珠 阻抗180Ω@100MHz", DC Resistance (DCR)=75mΩ, JLCPCB Part Class="Extended Part", LCSC Part Name="4.7uH ±20% 3.6A", Manufacturer=cjiang(长江微电), Manufacturer Part=FNR6020S4R7MT, Saturation Current (Isat)=3.6A, Tolerance=±20%, Add into BOM=yes, Convert to PCB=yes, Datasheet=https://atta.szlcsc.com/upload/public/pdf/source/20190327/C167925_9EFF0AABC4CA629C2CC95961DBF7D39D.pdf, Device=FNR6020S4R7MT, Supplier=LCSC, Supplier Footprint=SMD,6x6mm, Supplier Part=C168008, Symbol=FNR6020S4R7MT
L11: library part FXL0420-6R8-M, "6.8uH ±20% 2.5A SMD，4.4x4.2x1.8mm   合金电感，一体成型电感，大电流", Current Rating=4.15A, DC Resistance(DCR)=18mΩ, JLCPCB Part Class="Extended Part", LCSC Part Name="1uH ±30%", Manufacturer=Sunltech(顺磁), Manufacturer Part=SLW4030S1R0NST, Tolerance=±30%, Add into BOM=yes, Convert to PCB=yes, Datasheet=https://item.szlcsc.com/datasheet/SLW4030S1R0NST/207399.html, Device=SLW4030S1R0NST, Supplier=LCSC, Supplier Footprint=SMD,4x4mm, Supplier Part=C206354, Symbol=SLW4030S1R0NST
LED1 LED3: "30mA 2.6V~3.2V Blue 0603 LED Indication - Discrete ROHS"
LED2: "RGB三色 SMD-4P,1.6x1.6mm", Symbol=E6C0606RGBC3UDA
Q1 Q2 Q3: "N沟道,30V,100mA", Symbol=2SK3018_C194460
Q4: "1个P沟道 耐压:20V 电流:2.3A ,-20V,-2.3A,112mΩ@-4.5V"
Q5 Q6: "PNP hfe=200~300 PNP 电流:0.6A 电压:150V"
R1 R2 R3 R4 R5 R6 R8 R9 R10: "62.5mW 33Ω 50V ±100ppm/℃ Thick Film Resistor ±1% 0402 Chip Resistor - Surface Mount ROHS"
R7 R12 R45 R49 R59 R63 R77 R80 R86 R94 R102 R107 R108: "0Ω 62.5mW 50V Thick Film Resistor ±1% 0402 Chip Resistor - Surface Mount ROHS"
R11 R19 R21 R44 R46 R64 R65 R73 R75 R82 R83 R87 R95 R106 R114 R115 R117 R120: "62.5mW 10kΩ 50V ±100ppm/℃ Thick Film Resistor ±1% 0402 Chip Resistor - Surface Mount ROHS"
R13: library part 5.1kΩ, "5.1kΩ 62.5mW 50V ±100ppm/℃ Thick Film Resistor ±1% 0402 Chip Resistor - Surface Mount ROHS"
R14 R33: "100kΩ 62.5mW 50V ±100ppm/℃ Thick Film Resistor ±1% 0402 Chip Resistor - Surface Mount ROHS"
R15 R96 R119: "1kΩ 62.5mW 50V ±100ppm/℃ Thick Film Resistor ±1% 0402 Chip Resistor - Surface Mount ROHS"
R16 R50 R60 R88 R89: library part 0Ω, "0Ω 62.5mW 50V Thick Film Resistor ±1% 0402 Chip Resistor - Surface Mount ROHS"
R17 R22-R29 R23 R24 R25 R26 R27 R28 R29 R36 R58 R70 R71 R76 R79 R111 R121 R122: "小尺寸、重量轻。降低组装成本,与贴片机匹配。适用于波峰焊和回流焊"
R18 R20: "62.5mW 1.8kΩ 50V ±100ppm/℃ Thick Film Resistor ±1% 0402 Chip Resistor - Surface Mount ROHS"
R30: "特性：无卤环氧树脂。符合RoHS标准。无铅端接产品符合RoHS要求。RoHS豁免电极、电阻元件和玻璃中含有的铅玻璃。减少对环境有害的废物。高组件和设备可靠性。应用：所有通用应用"
R31 R32: "0603 3.6Ω ±1% 100mW 厚膜电阻"
R34 R35 R98 R99 R100 R101 R124: "2.2kΩ ±1% 62.5mW 厚膜电阻"
R37: "62.5mW 1MΩ 50V ±100ppm/℃ Thick Film Resistor ±1% 0402 Chip Resistor - Surface Mount ROHS"
R38: library part 0Ω-0201, "小尺寸、重量轻。降低组装成本,与贴片机匹配。适用于波峰焊和回流焊"
R39 R109: "62.5mW 232kΩ 50V ±100ppm/℃ Thick Film Resistor ±1% 0402 Chip Resistor - Surface Mount ROHS"
R40 R69 R72 R84 R85: "5.1kΩ 62.5mW 50V ±100ppm/℃ Thick Film Resistor ±1% 0402 Chip Resistor - Surface Mount ROHS"
R41 R54 R110: "62.5mW 47kΩ 50V ±100ppm/℃ Thick Film Resistor ±1% 0402 Chip Resistor - Surface Mount ROHS"
R42 R113: "62.5mW 30K 50V ±100ppm/℃ Thick Film Resistor ±1% 0402 Chip Resistor - Surface Mount ROHS"
R43 R57 R74: "51kΩ 62.5mW 50V ±100ppm/℃ Thick Film Resistor ±1% 0402 Chip Resistor - Surface Mount ROHS"
R47 R48 R51 R56 R67 R68 R103 R104 R105 R123: "100Ω 62.5mW 50V ±100ppm/℃ Thick Film Resistor ±1% 0402 Chip Resistor - Surface Mount ROHS"
R52: "62.5mW 180kΩ 50V ±100ppm/℃ Thick Film Resistor ±1% 0402 Chip Resistor - Surface Mount ROHS"
R53: "56kΩ 62.5mW 50V ±100ppm/℃ Thick Film Resistor ±1% 0402 Chip Resistor - Surface Mount ROHS"
R55: "62.5mW 120kΩ 50V ±100ppm/℃ Thick Film Resistor ±1% 0402 Chip Resistor - Surface Mount ROHS"
R61 R62: "240Ω 62.5mW 50V ±100ppm/℃ Thick Film Resistor ±1% 0402 Chip Resistor - Surface Mount ROHS"
R66 R116: library part 10kΩ, "62.5mW 10kΩ 50V ±100ppm/℃ Thick Film Resistor ±1% 0402 Chip Resistor - Surface Mount ROHS"
R78: "62.5mW 15kΩ 50V ±100ppm/℃ Thick Film Resistor ±1% 0402 Chip Resistor - Surface Mount ROHS"
R81: library part 10Ω, "10Ω 62.5mW 50V ±200ppm/℃ Thick Film Resistor ±1% 0402 Chip Resistor - Surface Mount ROHS"
R97: "62.5mW 120Ω 50V ±100ppm/℃ Thick Film Resistor ±1% 0402 Chip Resistor - Surface Mount ROHS"
R112: library part 30kΩ, "62.5mW 30K 50V ±100ppm/℃ Thick Film Resistor ±1% 0402 Chip Resistor - Surface Mount ROHS"
R118: "24kΩ 62.5mW 50V ±100ppm/℃ Thick Film Resistor ±1% 0402 Chip Resistor - Surface Mount ROHS"
SW1 SW2 SW3 SW4: "4pin 轻触开关 SMD​", Symbol=PTS815SJK250SMTRLFS
U1: "LPDDR4 - SDRAM是一种高速同步DRAM器件，内部配置有1个或2个通道。单通道由8个存储体组成，每通道密度为1 Gb至16 Gb。双通道由8个存储体组成，每通道密度为2 Gb至32 Gb", Symbol=H9HCNNNBKUMLXR-NEE
U2: "BGA-565(15.5x14.4)", Symbol=RK3566
U4 U5 U6 U8 U9 U10 U11 U29 U30 U31 U32 U35 U36 U37 U42 U43: library part ESD5451N_C5261080, "9A 9.8V 8V Bidirectional 5V DFN1006-2L TVS Diodes ROHS", Clamping Voltage=9.8V, JLCPCB Part Class="Extended Part", Junction Capacitance=15pF, LCSC Part Name="5V 15pF 双向", Manufacturer="HXY MOSFET(华轩阳电子)", Peak Pulse Current (Ipp)=9A, Reverse Leakage Current (Ir)=500nA, Reverse Stand-Off Voltage (Vrwm)=5V, Voltage - Breakdown=8V, Add into BOM=yes, Convert to PCB=yes, Datasheet=https://item.szlcsc.com/datasheet/ESD5451N/5983779.html, Device=ESD5451N_C5261080, level of protection="IEC 61000-4-2", Manufacturer Part=ESD5451N, Number of Channels=1.0, Polarity=Bidirectional, Supplier=LCSC, Supplier Footprint=DFN1006-2L, Supplier Part=C5261080, Symbol=ESD5451N_C5261080, Type=ESD
U7: "Push-Push 1.85mm Connector and Ejector MicroSD Card (TF Card) SMD PC Card Sockets ROHS"
U12: library part AP6212, "2.4GHz -90dBm QFN-44(12x12) RF Transceiver Modules and Modems ROHS", JLCPCB Part Class="Extended Part", Manufacturer=AMPAK(正基科技), Operating Temperature=-30℃~+85℃, Output Power=16dBm, Receive  Current=-, Add into BOM=yes, Antenna Type=-, Convert to PCB=yes, Datasheet=https://item.szlcsc.com/datasheet/AP6212/2941698.html, Device=AP6212, Interface Type="On-board PCB antenna", LCSC Part Name=AP6212, Manufacturer Part=AP6212, Send  Current=-, Sensitivity=-90dBm, Supplier=LCSC, Supplier Footprint=QFN-44(12x12), Supplier Part=C2798300, Symbol=AP6212, Utilized IC / Part=-, Voltage - Supply=-, Wireless Standard=-
U13: "10uH"
U14: "是一款DC/DC升压转换器，可为驱动LED提供精确的恒定电流。以1MHz的固定开关频率运行，允许该器件与小值外部陶瓷电容器和电感器一起使用。通过外部电阻器设置的调节电流驱动串联连接的LED，非常适合驱动多达八个串联的白色LED或高达30V的LED。", Symbol=SY7201ABC
U15 U16 U17 U18 U23 U24 U25 U26: "是双向 TVS（瞬态电压抑制器），专门用于保护连接到低速数据线和控制线的敏感电子元件，使其免受 ESD（静电放电）、EFT（电快速瞬变）和浪涌引起的过应力影响。", Symbol=ESD5451N
U19 U41: "高效率500kHz 3A 18V输入同步降压转换器 SY8113B是一款高效率的500kHz同步降压DC-DC转换器,能够提供3A的输出电流。其输入电压范围为4.5V至18V,集成了主开关和同步开关,具有非常低的导通损耗。采用瞬时PWM架构,实现快速瞬态响应。低输出电压纹波和小型外部电感器和电容器尺寸通过500kHz开关频率实现。内部软启动限制了浪涌电流。", Symbol=SY7201ABC
U21: library part WPN252012HR24MT
U22: "USBPD等多快充协议受电芯片CH224 ESSOP-10-150mil-1mm", Symbol=CH224K
U27: ";SMD,P=2.5mm;SMD,P=2.54mm", Symbol=ZX-XH2.54-2PLT
U33: "低损耗功率分配开关", Symbol=SY6280AAC
U38 U39 U40 U44: "6P 1x6P Gold Brass -40℃~+105℃ Black Pin Header 2.54mm 2.5mm 6mm 1kV 3mm 3A 1 Through Hole Through Hole,P=2.54mm Headers, Male Pins ROHS", Color=Black, Current Rating=3A, JLCPCB Part Class="Extended Part", LCSC Part Name="1x6P 间距:2.54mm 方针 直插", Manufacturer=hanxia(韩下), Operating Temperature=-40℃~+105℃, Voltage Rating (Max)=1kV, Add into BOM=yes, Circluar Pins/Square Pins="Pin Header", Contact Material=Brass, Contact Plating=Gold, Convert to PCB=yes, Datasheet=https://item.szlcsc.com/datasheet/HX%2520PZ2.54-1x6P%2520ZZ/34444552.html, Device="HX PZ2.54-1x6P ZZ", Insulation Height=2.5mm, Length of End Connection Pin=3mm, Length of Mating Pin=6mm, Manufacturer Part="HX PZ2.54-1x6P ZZ", Mounting Type="Through Hole", Number of Pins=6P, Number of Rows=1, Pin Structure=1x6P, Pitch=2.54mm, Row Spacing=-, Supplementary Features=-, Supplier=LCSC, Supplier Footprint=插件,P=2.54mm, Supplier Part=C32713272, Symbol="HX PZ2.54-1X6P ZZ"
USB1 USB3 USB4: "16pin type-c"
USB2: "Type-A 母 弯插", Current Rating-Power=2A, JLCPCB Part Class="Extended Part", LCSC Part Name="Type-A 母 侧插", Manufacturer=精拓金, Manufacturer Part=906-162A1011D10200, Operating Temperature=-, Add into BOM=yes, Connector Type=Type-A, Convert to PCB=yes, Datasheet=https://item.szlcsc.com/datasheet/906-162A1011D10200/40400.html, Device=906-162A1011D10200, Gender=Female, Mounting Type="Vertical, Flag", Number of Contacts=4P, Number of Ports=1, Protocol Standard="USB 2.0", Supplier=LCSC, Supplier Footprint=插件, Supplier Part=C39417, Symbol="AFSide of the three straight feet boundless copper14.0PBTWhite plastic90degree"
X1: library part Q22FA12800230, "Q22FA12800230 26MHz ±10ppm 10pF"
X2: library part X322524MOB4SI, "Crystal Oscillator 12pF SMD3225-4P Crystals ROHS", Frequency Stability=±20ppm, JLCPCB Part Class="Extended Part", LCSC Part Name="YSX321SL 24MHZ 4P 3225 12PF ±10PPM -40~85℃ (±20PPM)", Load Capacitance=12pF, Manufacturer=YXC(扬兴晶振), Normal temperature Frequency Tolerance=±10ppm, Operating Temperature=-40℃~+85℃, Add into BOM=yes, Convert to PCB=yes, Datasheet=https://item.szlcsc.com/datasheet/X322524MOB4SI/71688.html, Device=X322524MOB4SI, Manufacturer Part=X322524MOB4SI, Supplier=LCSC, Supplier Footprint=SMD3225-4P, Supplier Part=C70590, Symbol=X322524MOB4SI, Type="Surface Mount Crystal"
X3: "SMD3215-2P XKXGI-SUA-32.768K"
U3: Symbol=SDINBDG4-8G
U20: Symbol=RK809-5

## Free pads (board coordinates)
  round 0.5 hole 0.5 mask+0.05: ""(55.753,45.847) ""(56.134,109.347) ""(56.261,44.323) ""(56.388,47.498) ""(56.642,107.823) ""(56.769,110.998) ""(58.039,43.434) ""(58.039,48.133) ""(58.42,106.934) ""(58.42,111.633) ""(59.69,44.196) ""(59.69,47.498) ""(60.071,107.696) ""(60.071,110.998) ""(60.325,45.847) ""(60.706,109.347) ""(149.479,109.347) ""(149.493,45.885) ""(149.987,107.823) ""(150.001,44.361) ""(150.114,110.998) ""(150.128,47.536) ""(151.765,106.934) ""(151.765,111.633) ""(151.779,43.472) ""(151.779,48.171) ""(153.416,107.696) ""(153.416,110.998) ""(153.43,44.234) ""(153.43,47.536) ""(154.051,109.347) ""(154.065,45.885)
  round 6 hole 3.2 mask+0.05: ""(58.039,45.847) ""(58.42,109.347) ""(151.765,109.347) ""(151.779,45.885)

## Via types
v1: diameter 0.4, hole 0.3, Top Layer 1 to Bottom Layer 1, tented both sides, 873 vias

## Nets (pads, with @x,y where several pads share a name; then routed paths per layer and width w, separated by ;. In a path a pad name is that pad's centre, name@x,y a point inside that pad or via, vN(x,y) a via of type N, cw(c..) or ccw(c..) an arc to the next point about the centre after c; other vN are vias at no path point)
+12: F2.1 R111.2 R119.2 R120.1 USB4.2 USB4.11
BT_REG_ON_H: U2.D38 U12.34 | length 63.7
  Top Layer 1 w0.102: U12.34@81.725,94.183 81.802,94.107 85.979,94.107 86.536,93.55 v1(86.536,86.272) ; v1(107.246,62.84) 107.714,62.84 107.816,62.738 108.653,62.738 110.491,64.576 111.476,64.576 111.77,64.87 111.862,64.87 111.931,64.939 U2.D38@111.963,64.939
  Bottom Layer 1 w0.102: v1(86.536,86.272) 86.807,86.001 93.005,86.001 94.57,84.436 94.57,79.315 91.09,75.835 91.09,67.133 95.62,62.603 105.572,62.603 105.808,62.84 v1(107.246,62.84)
BT_WAKE_HOST_H: U2.A37 U12.7 | length 73.7
  Top Layer 1 w0.102: v1(111.049,61.361) 111.049,61.442 111.225,61.618 111.225,61.755 113.205,63.735 113.205,64.254 113.095,64.364 U2.A37@113.095,64.373
  Bottom Layer 1 w0.102: v1(71.755,87.503) 72.898,87.503 73.279,87.122 73.279,82.215 73.66,81.834 83.934,81.834 86.31,84.209 91.559,84.209 93.351,82.417 93.351,79.935 89.871,76.455 89.871,65.79 94.472,61.189 102.525,61.189 102.623,61.287 110.646,61.287 110.696,61.338 111.025,61.338 v1(111.049,61.361)
CC1: U22.7 USB4.4 | length 14.6
  Top Layer 1 w0.203: USB4.4@61,80.756 62.627,80.756 62.999,80.384 v1(62.999,76.908)
  SIG w0.203: v1(60.706,69.722) 62.102,69.722 62.999,70.619 v1(62.999,76.908)
CC2: U22.6 USB4.10 | length 9
  Top Layer 1 w0.203: USB4.10@61,77.756 62.198,77.756 62.484,77.47 v1(62.484,76.454)
  SIG w0.203: v1(61.682,70.421) 62.484,71.223 v1(62.484,76.454)
CLK1_M0_GPIO1_A4: U2.1A13 U40.1 | length 103.2
  Top Layer 1 w0.102: U40.1@105.902,110.761 107.315,109.348 107.315,106.553 106.172,105.41 v1(106.172,99.568)
  SIG w0.102: v1(115.996,69.17) 116.062,69.17 116.278,68.953 116.35,68.953 116.357,68.946 116.518,68.946 117.475,67.989 117.475,67.183 118.358,66.3 122.879,66.3 123.946,65.233 136.734,65.233 139.786,68.285 139.786,71.962 139.274,72.474 139.274,76.401 139.573,76.699 139.573,84.163 v1(139.066,84.67)
  Bottom Layer 1 w0.102: v1(106.172,99.568) 137.541,99.568 139.066,98.043 v1(139.066,84.67)
EMMC_CLKOUT/FLASH_DQS: R9.1 U3.M6 | length 12.6
  SIG w0.102: v1(117.247,62.202) 117.259,62.214 126.603,62.214 127.508,63.119 127.508,64.516 127.149,64.875 v1(127.074,64.875)
EMMC_CMD: R64.1 U2.A27 U3.M5 | length 16.1
  Top Layer 1 w0.102: U2.A27@115.923,67.202 115.923,67.169 115.983,67.11 115.983,67.108 116.986,66.105 116.986,63.196 117.191,62.992 117.983,62.992 118.46,63.469 118.594,63.469 118.6,63.463 120.027,63.463 120.161,63.33 120.161,62.925 120.101,62.865 119.058,62.865 118.804,62.611 117.122,62.611 116.85,62.339 116.85,62.169 116.837,62.156 116.837,62.017 v1(116.78,61.96)
  SIG w0.102: v1(116.78,61.96) 116.78,61.301 116.641,61.163 116.641,59.635 117.132,59.144 117.353,59.144 117.425,59.217 117.708,59.217 v1(117.765,59.274)
EMMC_D0/FLASH_D0: R114.2 SW4.1 SW4.2 U2.A32 U3.A3 | length 58.5
  Top Layer 1 w0.102: U2.A32@114.513,65.785 114.517,65.782 114.517,56.26 115.124,55.652 117.081,55.652 117.368,55.939 117.368,56.789 117.92,57.341 117.92,57.743 R114.2@118.023,57.845 ; v1(118.066,58.096) 118.023,58.053 R114.2@118.023,57.845 ; v1(124.714,56.515) 118.491,56.515 118.255,56.751 118.255,57.626 118.036,57.845 R114.2@118.023,57.845 ; v1(149.352,53.594) 149.352,57.985 SW4.2@149.363,57.996
  SIG w0.102: v1(115.693,56.352) 115.693,56.325 116.031,55.987 117.992,55.987 118.228,56.222 118.228,57.02 117.827,57.422 117.827,57.837 118.066,58.077 v1(118.066,58.096)
  Bottom Layer 1 w0.102: v1(115.693,56.352) 115.698,56.357 115.698,56.673 U3.A3@115.704,56.679 ; v1(124.714,56.515) 125.73,55.499 145.923,55.499 147.701,53.721 149.225,53.721 v1(149.352,53.594)
EMMC_D1/FLASH_D1: U2.B27 U3.A4 | length 16.8
  Top Layer 1 w0.102: U2.B27@115.644,67.483 115.644,67.069 116.514,66.199 116.514,65.674 v1(116.561,65.627)
  Bottom Layer 1 w0.102: U3.A4@116.204,56.679 116.188,56.663 116.188,56.081 115.86,55.753 113.919,55.753 113.326,56.346 113.326,57.544 114.284,58.502 114.284,63.151 114.589,63.456 114.749,63.456 116.119,64.826 116.119,65.184 v1(116.561,65.627)
EMMC_D2/FLASH_D2: U2.B32 U3.A5 | length 14.7
  Top Layer 1 w0.102: U2.B32@114.23,66.068 114.612,66.068 114.773,65.908 114.773,64.424 115.189,64.008 115.189,63.754 114.808,63.373 114.808,62.23 114.935,62.103 114.935,61.468 114.808,61.341 114.808,60.706 114.853,60.661 114.853,59.817 114.734,59.698 114.734,56.469 115.302,55.901 115.803,55.901 116.078,56.177 116.078,56.515 116.188,56.625 116.272,56.625 116.332,56.566 116.332,56.134 116.565,55.901 116.861,55.901 116.967,56.007 116.967,56.16 116.766,56.361 v1(116.766,56.469)
EMMC_D3/FLASH_D3: U2.B29 U3.A2 U3.B2 | length 15.3
  Top Layer 1 w0.102: U2.B29@115.078,66.917 115.08,66.919 115.506,66.919 116.159,66.266 116.159,64.677 116.497,64.339 116.497,63.949 116.069,63.522 116.069,63.127 115.532,62.59 115.532,62.319 115.189,61.976 115.189,61.595 115.278,61.506 115.481,61.506 115.713,61.738 116.504,61.738 116.668,61.573 116.668,61.189 116.609,61.129 115.358,61.129 115.06,60.831 115.06,60.73 115.056,57.023 115.056,56.884 115.186,56.755 v1(115.186,56.675)
  Bottom Layer 1 w0.102: U3.A2@115.189,56.664 U3.A2@115.204,56.679 U3.B2@115.204,57.179
EMMC_D4/FLASH_D4: U2.B33 U3.B3 | length 16.2
  Top Layer 1 w0.102: v1(113.919,61.468) 113.947,61.496 U2.B33@113.947,65.785
  SIG w0.102: v1(113.919,61.468) 113.919,61.453 114.317,61.056 114.317,60.175 113.665,59.524 113.665,59.182 113.919,58.928 114.808,58.928 115.316,58.42 115.316,58.039 115.189,57.912 114.728,57.912 114.554,58.086 114.554,58.293 114.427,58.42 113.792,58.42 113.665,58.293 113.665,57.862 113.869,57.658 114.046,57.658 114.173,57.531 114.173,57.277 114.046,57.15 114.046,56.479 114.264,56.261 114.681,56.261 114.77,56.35 114.77,56.985 114.859,57.074 114.892,57.074 114.997,57.179 115.276,57.179 115.334,57.121 115.713,57.121 v1(115.72,57.115)
EMMC_D5/FLASH_D5: U2.A30 U3.B4 U3.C5 | length 15
  Top Layer 1 w0.102: U2.A30@115.078,66.351 115.577,65.853 115.577,64.398 115.553,64.374 115.553,63.874 v1(115.609,63.818)
  SIG w0.102: v1(115.609,63.818) 115.529,63.818 114.778,63.067 114.778,62.536 115.443,61.871 115.443,61.468 114.935,60.96 114.935,60.424 115.923,59.436 116.459,59.436 117.094,58.801 117.983,58.801 118.237,59.055 118.491,59.055 118.618,58.928 118.618,58.674 118.364,58.42 118.24,58.42 118.212,58.448 117.884,58.448 117.744,58.308 117.406,58.308 v1(117.391,58.293) v1@117.384,58.286
  Bottom Layer 1 w0.102: U3.B4@116.204,57.179 116.732,57.707 116.732,57.894 117.075,58.236 117.334,58.236 v1(117.391,58.293)
EMMC_D6/FLASH_D6: U2.B30 U3.B5 | length 15.4
  Top Layer 1 w0.102: U2.B30@114.795,66.634 114.795,66.173 115.21,65.758 115.21,64.703 v1(115.153,64.646)
  SIG w0.102: v1(115.153,64.646) 115.162,64.655 115.557,64.655 115.637,64.735 115.637,65.016 115.062,65.591 115.062,65.927 114.822,66.167 114.427,66.167 114.285,66.025 114.285,65.166 114.681,64.77 114.681,64.389 114.935,64.135 114.935,63.881 114.513,63.459 114.513,62.514 114.632,62.394 114.632,59.882 116.728,57.786 v1(116.728,57.105)
EMMC_D7/FLASH_D7: U2.A33 U3.A7 U3.B6 | length 15
  Top Layer 1 w0.102: U2.A33@114.23,65.503 114.23,65.471 114.313,65.387 114.313,55.854 114.731,55.436 117.273,55.436 117.763,55.926 117.763,56.432 v1(117.785,56.453)
  Bottom Layer 1 w0.102: U3.B6@117.204,57.179 U3.A7@117.704,56.679 117.732,56.65 117.732,56.506 v1(117.785,56.453)
EMMC_DATA_STROBE: R7.2 R66.1 U3.H5 | length 14.6
  SIG w0.102: v1(116.187,60.543) 116.138,60.543 115.757,60.925 115.757,62.811 116.109,63.163 116.109,63.49 116.516,63.898 118.068,63.898 118.298,63.668 118.298,63.62 118.527,63.391 121.653,63.391 122.169,63.906 v1(126.117,63.906)
  Bottom Layer 1 w0.102: v1(116.187,60.543) 116.244,60.486 116.397,60.486 U3.H5@116.704,60.179
EMMC_DATA_STROBE/FLASH_CLE: R7.1 U2.1A16 | length 14.6
  SIG w0.102: v1(114.649,67.88) 114.986,67.543 114.986,67.125 116.143,65.968 116.143,65.476 117.254,64.365 118.51,64.365 118.516,64.371 121.863,64.371 121.954,64.462 126.546,64.462 v1(127,64.008)
EMMC_RSTN: C159.2 R65.1 U2.1B16 U3.K5 | length 25.3
  SIG w0.102: v1(113.976,68.172) 113.925,68.121 113.925,66.303 114.004,66.224 114.004,64.395 113.538,63.929 113.538,60.663 113.748,60.453 113.748,60.446 113.852,60.343 v1(113.852,60.262) 113.795,60.205 113.645,60.205 113.588,60.148 113.529,60.148 113.312,59.931 113.312,56.771 114.331,55.753 118.237,55.753 119.307,56.823 119.307,58.697 119.275,58.729 119.275,59.991 118.775,60.491 118.256,60.491 118.186,60.421 117.666,60.421 117.51,60.577 117.387,60.577 117.204,60.76 v1(117.123,60.76)
  Bottom Layer 1 w0.102: U3.K5@116.704,61.179 v1(117.123,60.76)
FLASH_VOL_SEL: R87.1 R89.2 U2.AF38 | length 28.2
  Top Layer 1 w0.102: v1(103.04,71.009) 105.357,71.009 105.487,71.139 105.718,71.139 U2.AF38@105.741,71.161
  SIG w0.102: v1(103.04,71.009) 103.934,70.115 103.979,70.115 104.775,69.319 104.775,69.01 104.155,68.39 103.936,68.39 103.124,67.578 103.124,66.954 102.711,66.541 100.972,66.541 100.251,67.262 100.251,73.35 100.399,73.498 100.399,74.491 100.457,74.549 100.457,76.073 100.894,76.51 102.91,76.51 103.104,76.316 103.955,76.316 103.97,76.33 104.065,76.33 v1(104.122,76.387)
  Bottom Layer 1 w0.102: R87.1@102.118,78.604 103.132,78.604 R89.2@103.136,78.6 103.136,77.966 104.048,77.054 104.048,76.542 104.122,76.468 v1(104.122,76.387)